# EAGLE board 13716-PI_Servo_Shield_panel.v10 (EAGLE 7.5.0), part 1 of 4
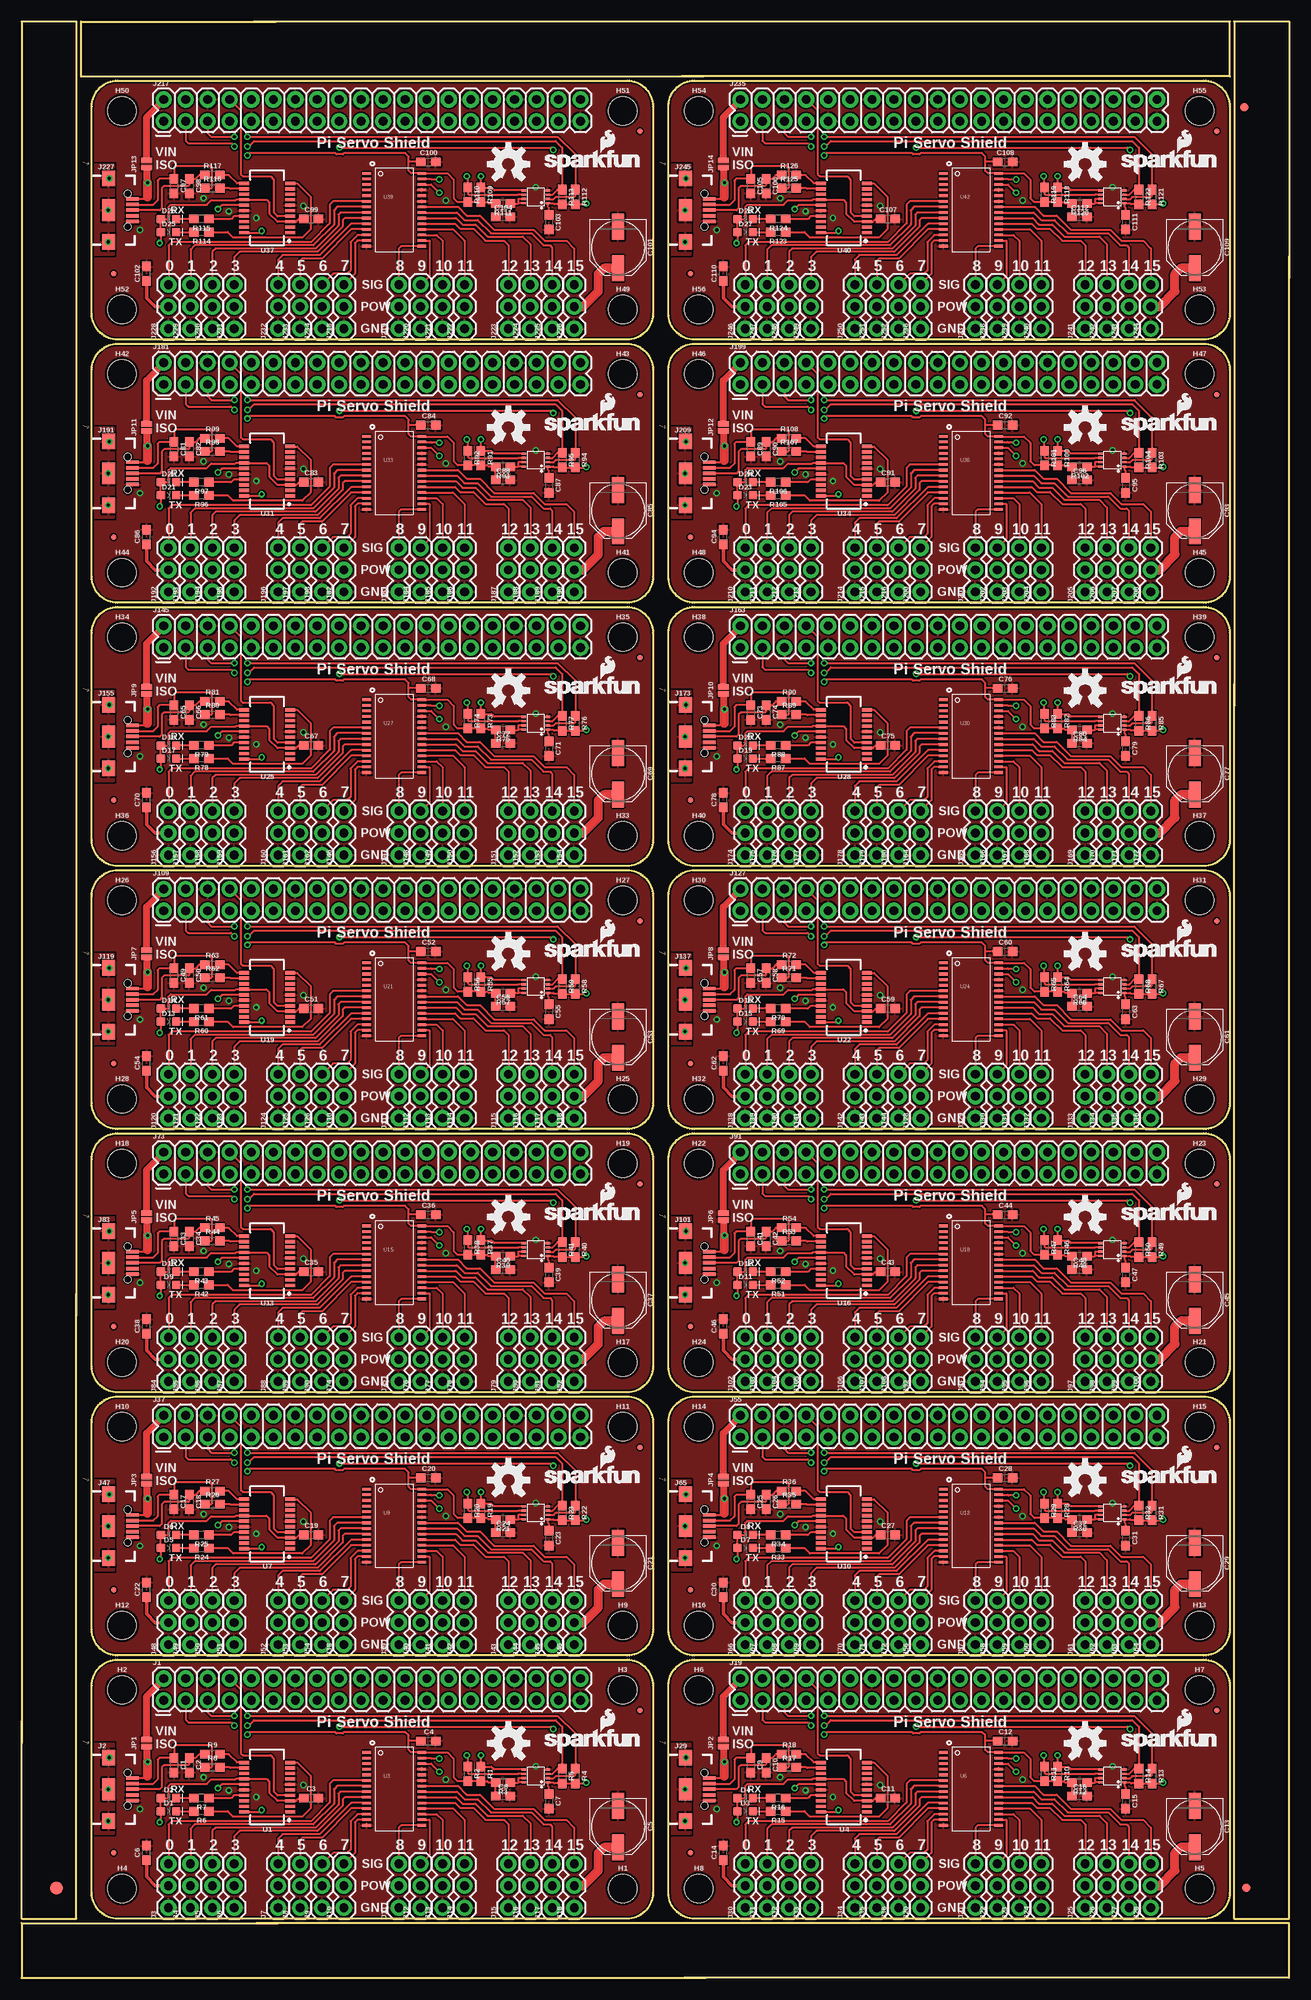
[diagram p0: board, top side]
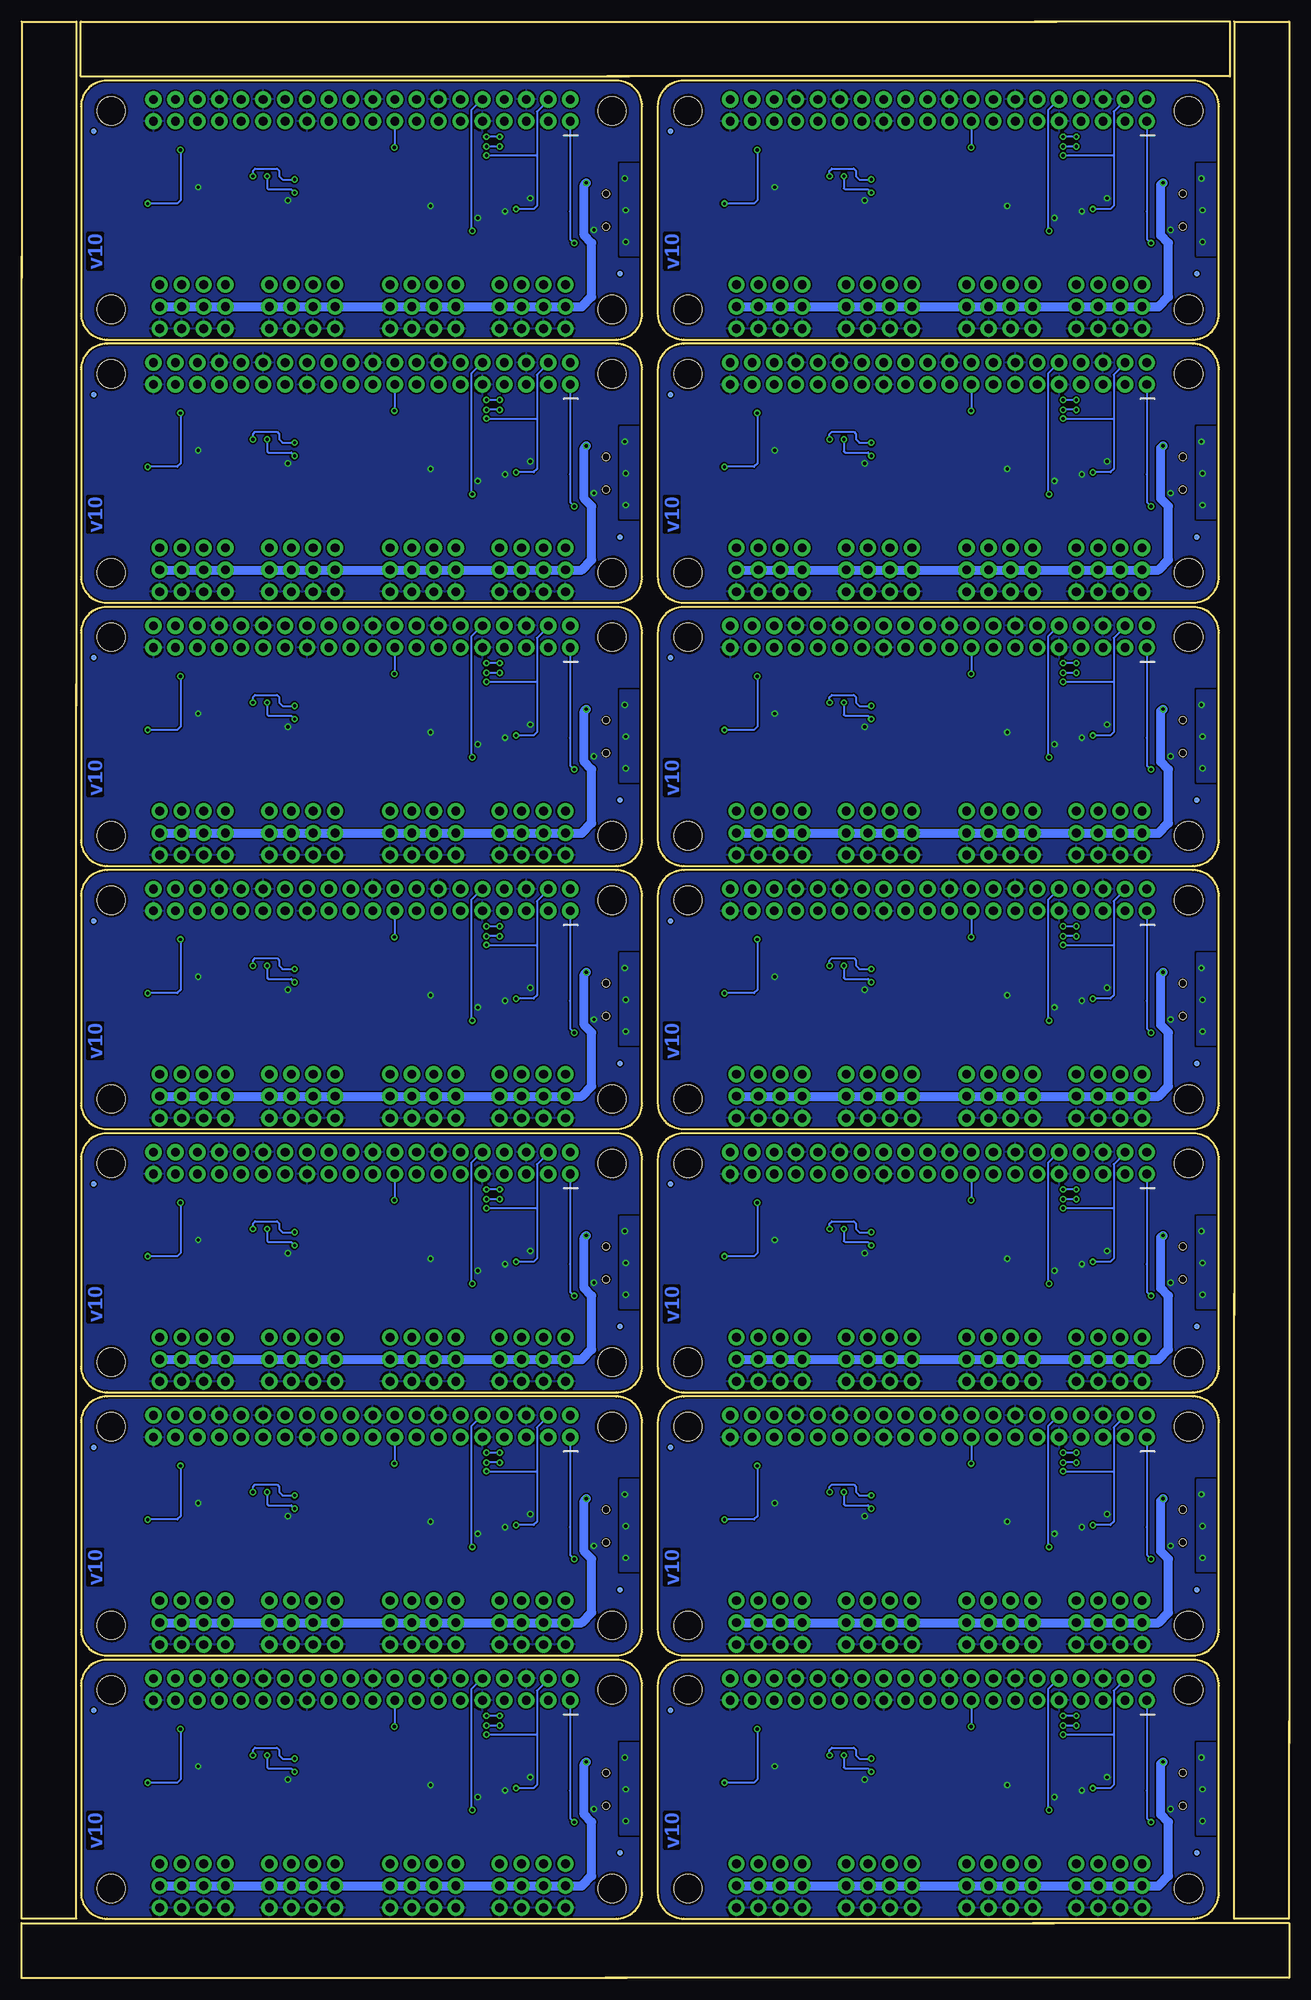
[diagram p1: board, bottom side, seen from below]

Size 146.81 x 226.57 mm. Coordinates in mm from the lower left corner, seen from the top.
Outline: 136 segments
Copper layers (1*16): Top 0.035mm / dielectric 1.5mm / Bottom 0.035mm
Design rules "SparkFun-2-layer-TIGHT": minimum track width 7mil, minimum drill 15mil, track to track 7mil, track to pad 7mil, pad to pad 7mil, via to via 7mil, smd to smd 7mil, copper to edge 7mil, drill to drill 7mil, minimum pad ring 7mil, minimum via ring 7mil, stop-mask expansion 4mil, vias tented up to drill 25mil, thermal gap 10mil

## Footprints (pad centres in the part's own frame; a part is rotated, then mirrored left to right if it is on the bottom)
0603 = smd 1.1 x 1: 1 -0.85,0; 2 0.85,0
PANASONIC_D = smd 3 x 1.4: + 2.4,0; - -2.4,0
LED-0603 = smd 1 x 1: A -0.877,0; C 0.877,0
FIDUCIAL-1.5X3 = smd 1.5 x 1.5: 1 0,0
FIDUCIAL-1X2 = smd 1 x 1: 1 0,0
FIDUCIAL-MICRO = smd 0.635 x 0.635: 1 0,0
STAND-OFF = hole 3.302: 0,0
2X20 = drill 1.016 pad 1.88: 1 0,0; 2 0,2.54; 3 2.54,0; 4 2.54,2.54; 5 5.08,0; 6 5.08,2.54; 7 7.62,0; 8 7.62,2.54; 9 10.16,0; 10 10.16,2.54; 11 12.7,0; 12 12.7,2.54; 13 15.24,0; 14 15.24,2.54; 15 17.78,0; 16 17.78,2.54; 17 20.32,0; 18 20.32,2.54; 19 22.86,0; 20 22.86,2.54; 21 25.4,0; 22 25.4,2.54; 23 27.94,0; 24 27.94,2.54; 25 30.48,0; 26 30.48,2.54; 27 33.02,0; 28 33.02,2.54; 29 35.56,0; 30 35.56,2.54; 31 38.1,0; 32 38.1,2.54; 33 40.64,0; 34 40.64,2.54; 35 43.18,0; 36 43.18,2.54; 37 45.72,0; 38 45.72,2.54; 39 48.26,0; 40 48.26,2.54
USB-B-MICRO-SMD = smd 1.45 x 0.4: D+ 2.725,0; D- 2.725,0.65; GND 2.725,-1.3; ID 2.725,-0.65; VBUS 2.725,1.3 | smd 1.5 x 1.8: SHIELD1 0,3.685; SHIELD2 0,-3.685 | smd 1.5 x 2.5: SHIELD3 0,0 | hole 0.85: 2.2,1.9; 2.2,-1.9
1X03 = drill 1.016 pad 1.88: 1 0,0; 2 2.54,0; 3 5.08,0
SMT-JUMPER_2_NC_PASTE_NO-SILK = smd 0.635 x 1.27: 1 -0.406,0; 2 0.406,0
SSOP20_L = smd 0.381 x 1.143: 1 -2.857,-2.68; 2 -2.223,-2.68; 3 -1.587,-2.68; 4 -0.953,-2.68; 5 -0.318,-2.68; 6 0.318,-2.68; 7 0.953,-2.68; 8 1.587,-2.68; 9 2.223,-2.68; 10 2.857,-2.68; 11 2.857,2.68; 12 2.223,2.68; 13 1.587,2.68; 14 0.953,2.68; 15 0.318,2.68; 16 -0.318,2.68; 17 -0.953,2.68; 18 -1.587,2.68; 19 -2.223,2.68; 20 -2.857,2.68
PSOP-8 = smd 0.25 x 0.5: 1 -0.73,-1.37; 2 -0.23,-1.37; 3 0.27,-1.37; 4 0.77,-1.37; 5 0.77,1.38; 6 0.27,1.38; 7 -0.23,1.38; 8 -0.73,1.38
TSSOP-28_4MM = smd 1 x 0.3: 1 -3.2,4.225; 2 -3.2,3.575; 3 -3.2,2.925; 4 -3.2,2.275; 5 -3.2,1.625; 6 -3.2,0.975; 7 -3.2,0.325; 8 -3.2,-0.325; 9 -3.2,-0.975; 10 -3.2,-1.625; 11 -3.2,-2.275; 12 -3.2,-2.925; 13 -3.2,-3.575; 14 -3.2,-4.225; 15 3.2,-4.225; 16 3.2,-3.575; 17 3.2,-2.925; 18 3.2,-2.275; 19 3.2,-1.625; 20 3.2,-0.975; 21 3.2,-0.325; 22 3.2,0.325; 23 3.2,0.975; 24 3.2,1.625; 25 3.2,2.275; 26 3.2,2.925; 27 3.2,3.575; 28 3.2,4.225

## Placement (x,y rotation side)
C1  47pF  [0603]  17.65,24.64 270 top
C2  47pF  [0603]  19.43,24.64 270 top
C3  0.1uF  [0603]  33.53,20.83 0 top
C4  0.1uF  [0603]  47.12,27.43 0 top
C5  100uF  [PANASONIC_D]  69.09,17.53 270 top
C6  0.1uF  [0603]  14.48,14.48 90 top
C7  0.1uF  [0603]  61.09,20.45 270 top
C8  0.1uF  [0603]  55.75,21.08 0 top
C9  47pF  [0603]  84.45,24.64 270 top
C10  47pF  [0603]  86.23,24.64 270 top
C11  0.1uF  [0603]  100.33,20.83 0 top
C12  0.1uF  [0603]  113.92,27.43 0 top
C13  100uF  [PANASONIC_D]  135.89,17.53 270 top
C14  0.1uF  [0603]  81.28,14.48 90 top
C15  0.1uF  [0603]  127.89,20.45 270 top
C16  0.1uF  [0603]  122.56,21.08 0 top
C17  47pF  [0603]  17.65,55.12 270 top
C18  47pF  [0603]  19.43,55.12 270 top
C19  0.1uF  [0603]  33.53,51.31 0 top
C20  0.1uF  [0603]  47.12,57.91 0 top
C21  100uF  [PANASONIC_D]  69.09,48.01 270 top
C22  0.1uF  [0603]  14.48,44.96 90 top
C23  0.1uF  [0603]  61.09,50.93 270 top
C24  0.1uF  [0603]  55.75,51.56 0 top
C25  47pF  [0603]  84.45,55.12 270 top
C26  47pF  [0603]  86.23,55.12 270 top
C27  0.1uF  [0603]  100.33,51.31 0 top
C28  0.1uF  [0603]  113.92,57.91 0 top
C29  100uF  [PANASONIC_D]  135.89,48.01 270 top
C30  0.1uF  [0603]  81.28,44.96 90 top
C31  0.1uF  [0603]  127.89,50.93 270 top
C32  0.1uF  [0603]  122.56,51.56 0 top
C33  47pF  [0603]  17.65,85.6 270 top
C34  47pF  [0603]  19.43,85.6 270 top
C35  0.1uF  [0603]  33.53,81.79 0 top
C36  0.1uF  [0603]  47.12,88.39 0 top
C37  100uF  [PANASONIC_D]  69.09,78.49 270 top
C38  0.1uF  [0603]  14.48,75.44 90 top
C39  0.1uF  [0603]  61.09,81.41 270 top
C40  0.1uF  [0603]  55.75,82.04 0 top
C41  47pF  [0603]  84.45,85.6 270 top
C42  47pF  [0603]  86.23,85.6 270 top
C43  0.1uF  [0603]  100.33,81.79 0 top
C44  0.1uF  [0603]  113.92,88.39 0 top
C45  100uF  [PANASONIC_D]  135.89,78.49 270 top
C46  0.1uF  [0603]  81.28,75.44 90 top
C47  0.1uF  [0603]  127.89,81.41 270 top
C48  0.1uF  [0603]  122.56,82.04 0 top
C49  47pF  [0603]  17.65,116.08 270 top
C50  47pF  [0603]  19.43,116.08 270 top
C51  0.1uF  [0603]  33.53,112.27 0 top
C52  0.1uF  [0603]  47.12,118.87 0 top
C53  100uF  [PANASONIC_D]  69.09,108.97 270 top
C54  0.1uF  [0603]  14.48,105.92 90 top
C55  0.1uF  [0603]  61.09,111.89 270 top
C56  0.1uF  [0603]  55.75,112.52 0 top
C57  47pF  [0603]  84.45,116.08 270 top
C58  47pF  [0603]  86.23,116.08 270 top
C59  0.1uF  [0603]  100.33,112.27 0 top
C60  0.1uF  [0603]  113.92,118.87 0 top
C61  100uF  [PANASONIC_D]  135.89,108.97 270 top
C62  0.1uF  [0603]  81.28,105.92 90 top
C63  0.1uF  [0603]  127.89,111.89 270 top
C64  0.1uF  [0603]  122.56,112.52 0 top
C65  47pF  [0603]  17.65,146.56 270 top
C66  47pF  [0603]  19.43,146.56 270 top
C67  0.1uF  [0603]  33.53,142.75 0 top
C68  0.1uF  [0603]  47.12,149.35 0 top
C69  100uF  [PANASONIC_D]  69.09,139.45 270 top
C70  0.1uF  [0603]  14.48,136.4 90 top
C71  0.1uF  [0603]  61.09,142.37 270 top
C72  0.1uF  [0603]  55.75,143 0 top
C73  47pF  [0603]  84.45,146.56 270 top
C74  47pF  [0603]  86.23,146.56 270 top
C75  0.1uF  [0603]  100.33,142.75 0 top
C76  0.1uF  [0603]  113.92,149.35 0 top
C77  100uF  [PANASONIC_D]  135.89,139.45 270 top
C78  0.1uF  [0603]  81.28,136.4 90 top
C79  0.1uF  [0603]  127.89,142.37 270 top
C80  0.1uF  [0603]  122.56,143 0 top
C81  47pF  [0603]  17.65,177.04 270 top
C82  47pF  [0603]  19.43,177.04 270 top
C83  0.1uF  [0603]  33.53,173.23 0 top
C84  0.1uF  [0603]  47.12,179.83 0 top
C85  100uF  [PANASONIC_D]  69.09,169.93 270 top
C86  0.1uF  [0603]  14.48,166.88 90 top
C87  0.1uF  [0603]  61.09,172.85 270 top
C88  0.1uF  [0603]  55.75,173.48 0 top
C89  47pF  [0603]  84.45,177.04 270 top
C90  47pF  [0603]  86.23,177.04 270 top
C91  0.1uF  [0603]  100.33,173.23 0 top
C92  0.1uF  [0603]  113.92,179.83 0 top
C93  100uF  [PANASONIC_D]  135.89,169.93 270 top
C94  0.1uF  [0603]  81.28,166.88 90 top
C95  0.1uF  [0603]  127.89,172.85 270 top
C96  0.1uF  [0603]  122.56,173.48 0 top
C97  47pF  [0603]  17.65,207.52 270 top
C98  47pF  [0603]  19.43,207.52 270 top
C99  0.1uF  [0603]  33.53,203.71 0 top
C100  0.1uF  [0603]  47.12,210.31 0 top
C101  100uF  [PANASONIC_D]  69.09,200.41 270 top
C102  0.1uF  [0603]  14.48,197.36 90 top
C103  0.1uF  [0603]  61.09,203.33 270 top
C104  0.1uF  [0603]  55.75,203.96 0 top
C105  47pF  [0603]  84.45,207.52 270 top
C106  47pF  [0603]  86.23,207.52 270 top
C107  0.1uF  [0603]  100.33,203.71 0 top
C108  0.1uF  [0603]  113.92,210.31 0 top
C109  100uF  [PANASONIC_D]  135.89,200.41 270 top
C110  0.1uF  [0603]  81.28,197.36 90 top
C111  0.1uF  [0603]  127.89,203.33 270 top
C112  0.1uF  [0603]  122.56,203.96 0 top
D1  GREEN  [LED-0603]  17.02,19.3 0 top
D2  Yellow  [LED-0603]  17.02,20.83 0 top
D3  GREEN  [LED-0603]  83.82,19.3 0 top
D4  Yellow  [LED-0603]  83.82,20.83 0 top
D5  GREEN  [LED-0603]  17.02,49.78 0 top
D6  Yellow  [LED-0603]  17.02,51.31 0 top
D7  GREEN  [LED-0603]  83.82,49.78 0 top
D8  Yellow  [LED-0603]  83.82,51.31 0 top
D9  GREEN  [LED-0603]  17.02,80.26 0 top
D10  Yellow  [LED-0603]  17.02,81.79 0 top
D11  GREEN  [LED-0603]  83.82,80.26 0 top
D12  Yellow  [LED-0603]  83.82,81.79 0 top
D13  GREEN  [LED-0603]  17.02,110.74 0 top
D14  Yellow  [LED-0603]  17.02,112.27 0 top
D15  GREEN  [LED-0603]  83.82,110.74 0 top
D16  Yellow  [LED-0603]  83.82,112.27 0 top
D17  GREEN  [LED-0603]  17.02,141.22 0 top
D18  Yellow  [LED-0603]  17.02,142.75 0 top
D19  GREEN  [LED-0603]  83.82,141.22 0 top
D20  Yellow  [LED-0603]  83.82,142.75 0 top
D21  GREEN  [LED-0603]  17.02,171.7 0 top
D22  Yellow  [LED-0603]  17.02,173.23 0 top
D23  GREEN  [LED-0603]  83.82,171.7 0 top
D24  Yellow  [LED-0603]  83.82,173.23 0 top
D25  GREEN  [LED-0603]  17.02,202.18 0 top
D26  Yellow  [LED-0603]  17.02,203.71 0 top
D27  GREEN  [LED-0603]  83.82,202.18 0 top
D28  Yellow  [LED-0603]  83.82,203.71 0 top
E$1  [FIDUCIAL-1.5X3]  4.06,10.41 0 top
E$7  [FIDUCIAL-1X2]  141.6,216.66 180 top
E$8  [FIDUCIAL-1X2]  141.86,10.41 0 top
FD1  FIDUCIALUFIDUCIAL  [FIDUCIAL-MICRO]  10.67,14.48 0 top
FD2  FIDUCIALUFIDUCIAL  [FIDUCIAL-MICRO]  71.63,30.99 0 top
FD3  FIDUCIALUFIDUCIAL  [FIDUCIAL-MICRO]  10.67,14.48 0 bottom
FD4  FIDUCIALUFIDUCIAL  [FIDUCIAL-MICRO]  71.63,30.99 0 bottom
FD5  FIDUCIALUFIDUCIAL  [FIDUCIAL-MICRO]  77.47,14.48 0 top
FD6  FIDUCIALUFIDUCIAL  [FIDUCIAL-MICRO]  138.43,30.99 0 top
FD7  FIDUCIALUFIDUCIAL  [FIDUCIAL-MICRO]  77.47,14.48 0 bottom
FD8  FIDUCIALUFIDUCIAL  [FIDUCIAL-MICRO]  138.43,30.99 0 bottom
FD9  FIDUCIALUFIDUCIAL  [FIDUCIAL-MICRO]  10.67,44.96 0 top
FD10  FIDUCIALUFIDUCIAL  [FIDUCIAL-MICRO]  71.63,61.47 0 top
FD11  FIDUCIALUFIDUCIAL  [FIDUCIAL-MICRO]  10.67,44.96 0 bottom
FD12  FIDUCIALUFIDUCIAL  [FIDUCIAL-MICRO]  71.63,61.47 0 bottom
FD13  FIDUCIALUFIDUCIAL  [FIDUCIAL-MICRO]  77.47,44.96 0 top
FD14  FIDUCIALUFIDUCIAL  [FIDUCIAL-MICRO]  138.43,61.47 0 top
FD15  FIDUCIALUFIDUCIAL  [FIDUCIAL-MICRO]  77.47,44.96 0 bottom
FD16  FIDUCIALUFIDUCIAL  [FIDUCIAL-MICRO]  138.43,61.47 0 bottom
FD17  FIDUCIALUFIDUCIAL  [FIDUCIAL-MICRO]  10.67,75.44 0 top
FD18  FIDUCIALUFIDUCIAL  [FIDUCIAL-MICRO]  71.63,91.95 0 top
FD19  FIDUCIALUFIDUCIAL  [FIDUCIAL-MICRO]  10.67,75.44 0 bottom
FD20  FIDUCIALUFIDUCIAL  [FIDUCIAL-MICRO]  71.63,91.95 0 bottom
FD21  FIDUCIALUFIDUCIAL  [FIDUCIAL-MICRO]  77.47,75.44 0 top
FD22  FIDUCIALUFIDUCIAL  [FIDUCIAL-MICRO]  138.43,91.95 0 top
FD23  FIDUCIALUFIDUCIAL  [FIDUCIAL-MICRO]  77.47,75.44 0 bottom
FD24  FIDUCIALUFIDUCIAL  [FIDUCIAL-MICRO]  138.43,91.95 0 bottom
FD25  FIDUCIALUFIDUCIAL  [FIDUCIAL-MICRO]  10.67,105.92 0 top
FD26  FIDUCIALUFIDUCIAL  [FIDUCIAL-MICRO]  71.63,122.43 0 top
FD27  FIDUCIALUFIDUCIAL  [FIDUCIAL-MICRO]  10.67,105.92 0 bottom
FD28  FIDUCIALUFIDUCIAL  [FIDUCIAL-MICRO]  71.63,122.43 0 bottom
FD29  FIDUCIALUFIDUCIAL  [FIDUCIAL-MICRO]  77.47,105.92 0 top
FD30  FIDUCIALUFIDUCIAL  [FIDUCIAL-MICRO]  138.43,122.43 0 top
FD31  FIDUCIALUFIDUCIAL  [FIDUCIAL-MICRO]  77.47,105.92 0 bottom
FD32  FIDUCIALUFIDUCIAL  [FIDUCIAL-MICRO]  138.43,122.43 0 bottom
FD33  FIDUCIALUFIDUCIAL  [FIDUCIAL-MICRO]  10.67,136.4 0 top
FD34  FIDUCIALUFIDUCIAL  [FIDUCIAL-MICRO]  71.63,152.91 0 top
FD35  FIDUCIALUFIDUCIAL  [FIDUCIAL-MICRO]  10.67,136.4 0 bottom
FD36  FIDUCIALUFIDUCIAL  [FIDUCIAL-MICRO]  71.63,152.91 0 bottom
FD37  FIDUCIALUFIDUCIAL  [FIDUCIAL-MICRO]  77.47,136.4 0 top
FD38  FIDUCIALUFIDUCIAL  [FIDUCIAL-MICRO]  138.43,152.91 0 top
FD39  FIDUCIALUFIDUCIAL  [FIDUCIAL-MICRO]  77.47,136.4 0 bottom
FD40  FIDUCIALUFIDUCIAL  [FIDUCIAL-MICRO]  138.43,152.91 0 bottom
FD41  FIDUCIALUFIDUCIAL  [FIDUCIAL-MICRO]  10.67,166.88 0 top
FD42  FIDUCIALUFIDUCIAL  [FIDUCIAL-MICRO]  71.63,183.39 0 top
FD43  FIDUCIALUFIDUCIAL  [FIDUCIAL-MICRO]  10.67,166.88 0 bottom
FD44  FIDUCIALUFIDUCIAL  [FIDUCIAL-MICRO]  71.63,183.39 0 bottom
FD45  FIDUCIALUFIDUCIAL  [FIDUCIAL-MICRO]  77.47,166.88 0 top
FD46  FIDUCIALUFIDUCIAL  [FIDUCIAL-MICRO]  138.43,183.39 0 top
FD47  FIDUCIALUFIDUCIAL  [FIDUCIAL-MICRO]  77.47,166.88 0 bottom
FD48  FIDUCIALUFIDUCIAL  [FIDUCIAL-MICRO]  138.43,183.39 0 bottom
FD49  FIDUCIALUFIDUCIAL  [FIDUCIAL-MICRO]  10.67,197.36 0 top
FD50  FIDUCIALUFIDUCIAL  [FIDUCIAL-MICRO]  71.63,213.87 0 top
FD51  FIDUCIALUFIDUCIAL  [FIDUCIAL-MICRO]  10.67,197.36 0 bottom
FD52  FIDUCIALUFIDUCIAL  [FIDUCIAL-MICRO]  71.63,213.87 0 bottom
FD53  FIDUCIALUFIDUCIAL  [FIDUCIAL-MICRO]  77.47,197.36 0 top
FD54  FIDUCIALUFIDUCIAL  [FIDUCIAL-MICRO]  138.43,213.87 0 top
FD55  FIDUCIALUFIDUCIAL  [FIDUCIAL-MICRO]  77.47,197.36 0 bottom
FD56  FIDUCIALUFIDUCIAL  [FIDUCIAL-MICRO]  138.43,213.87 0 bottom
H1  STAND-OFF  [STAND-OFF]  69.63,10.36 0 top
H2  STAND-OFF  [STAND-OFF]  11.63,33.36 0 top
H3  STAND-OFF  [STAND-OFF]  69.63,33.36 0 top
H4  STAND-OFF  [STAND-OFF]  11.63,10.36 0 top
H5  STAND-OFF  [STAND-OFF]  136.43,10.36 0 top
H6  STAND-OFF  [STAND-OFF]  78.43,33.36 0 top
H7  STAND-OFF  [STAND-OFF]  136.43,33.36 0 top
H8  STAND-OFF  [STAND-OFF]  78.43,10.36 0 top
H9  STAND-OFF  [STAND-OFF]  69.63,40.84 0 top
H10  STAND-OFF  [STAND-OFF]  11.63,63.84 0 top
H11  STAND-OFF  [STAND-OFF]  69.63,63.84 0 top
H12  STAND-OFF  [STAND-OFF]  11.63,40.84 0 top
H13  STAND-OFF  [STAND-OFF]  136.43,40.84 0 top
H14  STAND-OFF  [STAND-OFF]  78.43,63.84 0 top
H15  STAND-OFF  [STAND-OFF]  136.43,63.84 0 top
H16  STAND-OFF  [STAND-OFF]  78.43,40.84 0 top
H17  STAND-OFF  [STAND-OFF]  69.63,71.32 0 top
H18  STAND-OFF  [STAND-OFF]  11.63,94.32 0 top
H19  STAND-OFF  [STAND-OFF]  69.63,94.32 0 top
H20  STAND-OFF  [STAND-OFF]  11.63,71.32 0 top
H21  STAND-OFF  [STAND-OFF]  136.43,71.32 0 top
H22  STAND-OFF  [STAND-OFF]  78.43,94.32 0 top
H23  STAND-OFF  [STAND-OFF]  136.43,94.32 0 top
H24  STAND-OFF  [STAND-OFF]  78.43,71.32 0 top
H25  STAND-OFF  [STAND-OFF]  69.63,101.8 0 top
H26  STAND-OFF  [STAND-OFF]  11.63,124.8 0 top
H27  STAND-OFF  [STAND-OFF]  69.63,124.8 0 top
H28  STAND-OFF  [STAND-OFF]  11.63,101.8 0 top
H29  STAND-OFF  [STAND-OFF]  136.43,101.8 0 top
H30  STAND-OFF  [STAND-OFF]  78.43,124.8 0 top
H31  STAND-OFF  [STAND-OFF]  136.43,124.8 0 top
H32  STAND-OFF  [STAND-OFF]  78.43,101.8 0 top
H33  STAND-OFF  [STAND-OFF]  69.63,132.28 0 top
H34  STAND-OFF  [STAND-OFF]  11.63,155.28 0 top
H35  STAND-OFF  [STAND-OFF]  69.63,155.28 0 top
H36  STAND-OFF  [STAND-OFF]  11.63,132.28 0 top
H37  STAND-OFF  [STAND-OFF]  136.43,132.28 0 top
H38  STAND-OFF  [STAND-OFF]  78.43,155.28 0 top
H39  STAND-OFF  [STAND-OFF]  136.43,155.28 0 top
H40  STAND-OFF  [STAND-OFF]  78.43,132.28 0 top
H41  STAND-OFF  [STAND-OFF]  69.63,162.76 0 top
H42  STAND-OFF  [STAND-OFF]  11.63,185.76 0 top
H43  STAND-OFF  [STAND-OFF]  69.63,185.76 0 top
H44  STAND-OFF  [STAND-OFF]  11.63,162.76 0 top
H45  STAND-OFF  [STAND-OFF]  136.43,162.76 0 top
H46  STAND-OFF  [STAND-OFF]  78.43,185.76 0 top
H47  STAND-OFF  [STAND-OFF]  136.43,185.76 0 top
H48  STAND-OFF  [STAND-OFF]  78.43,162.76 0 top
H49  STAND-OFF  [STAND-OFF]  69.63,193.24 0 top
H50  STAND-OFF  [STAND-OFF]  11.63,216.24 0 top
H51  STAND-OFF  [STAND-OFF]  69.63,216.24 0 top
H52  STAND-OFF  [STAND-OFF]  11.63,193.24 0 top
H53  STAND-OFF  [STAND-OFF]  136.43,193.24 0 top
H54  STAND-OFF  [STAND-OFF]  78.43,216.24 0 top
H55  STAND-OFF  [STAND-OFF]  136.43,216.24 0 top
H56  STAND-OFF  [STAND-OFF]  78.43,193.24 0 top
J1  RASPBERRYPI-40-PIN-GPIO_PTH_NO_SHROUD  [2X20]  16.47,32.14 0 top
J2  [USB-B-MICRO-SMD]  10.11,21.85 0 top
J3  [1X03]  17.02,8.13 90 top
J4  [1X03]  19.56,8.13 90 top
J5  [1X03]  22.1,8.13 90 top
J6  [1X03]  24.64,8.13 90 top
J7  [1X03]  29.72,8.13 90 top
J8  [1X03]  32.26,8.13 90 top
J9  [1X03]  34.8,8.13 90 top
J10  [1X03]  37.34,8.13 90 top
J11  [1X03]  43.69,8.13 90 top
J12  [1X03]  46.23,8.13 90 top
J13  [1X03]  48.77,8.13 90 top
J14  [1X03]  51.31,8.13 90 top
J15  [1X03]  56.39,8.13 90 top
J16  [1X03]  58.93,8.13 90 top
J17  [1X03]  61.47,8.13 90 top
J18  [1X03]  64.01,8.13 90 top
J19  RASPBERRYPI-40-PIN-GPIO_PTH_NO_SHROUD  [2X20]  83.27,32.14 0 top
J20  [1X03]  104.14,8.13 90 top
J21  [1X03]  110.49,8.13 90 top
J22  [1X03]  113.03,8.13 90 top
J23  [1X03]  115.57,8.13 90 top
J24  [1X03]  118.11,8.13 90 top
J25  [1X03]  123.19,8.13 90 top
J26  [1X03]  125.73,8.13 90 top
J27  [1X03]  128.27,8.13 90 top
J28  [1X03]  130.81,8.13 90 top
J29  [USB-B-MICRO-SMD]  76.91,21.85 0 top
J30  [1X03]  83.82,8.13 90 top
J31  [1X03]  86.36,8.13 90 top
J32  [1X03]  88.9,8.13 90 top
J33  [1X03]  91.44,8.13 90 top
J34  [1X03]  96.52,8.13 90 top
J35  [1X03]  99.06,8.13 90 top
J36  [1X03]  101.6,8.13 90 top
J37  RASPBERRYPI-40-PIN-GPIO_PTH_NO_SHROUD  [2X20]  16.47,62.62 0 top
J38  [1X03]  37.34,38.61 90 top
J39  [1X03]  43.69,38.61 90 top
J40  [1X03]  46.23,38.61 90 top
J41  [1X03]  48.77,38.61 90 top
J42  [1X03]  51.31,38.61 90 top
J43  [1X03]  56.39,38.61 90 top
J44  [1X03]  58.93,38.61 90 top
J45  [1X03]  61.47,38.61 90 top
J46  [1X03]  64.01,38.61 90 top
J47  [USB-B-MICRO-SMD]  10.11,52.33 0 top
J48  [1X03]  17.02,38.61 90 top
J49  [1X03]  19.56,38.61 90 top
J50  [1X03]  22.1,38.61 90 top
J51  [1X03]  24.64,38.61 90 top
J52  [1X03]  29.72,38.61 90 top
J53  [1X03]  32.26,38.61 90 top
J54  [1X03]  34.8,38.61 90 top
J55  RASPBERRYPI-40-PIN-GPIO_PTH_NO_SHROUD  [2X20]  83.27,62.62 0 top
J56  [1X03]  104.14,38.61 90 top
J57  [1X03]  110.49,38.61 90 top
J58  [1X03]  113.03,38.61 90 top
J59  [1X03]  115.57,38.61 90 top
J60  [1X03]  118.11,38.61 90 top
J61  [1X03]  123.19,38.61 90 top
J62  [1X03]  125.73,38.61 90 top
J63  [1X03]  128.27,38.61 90 top
J64  [1X03]  130.81,38.61 90 top
J65  [USB-B-MICRO-SMD]  76.91,52.33 0 top
J66  [1X03]  83.82,38.61 90 top
J67  [1X03]  86.36,38.61 90 top
J68  [1X03]  88.9,38.61 90 top
J69  [1X03]  91.44,38.61 90 top
J70  [1X03]  96.52,38.61 90 top
J71  [1X03]  99.06,38.61 90 top
J72  [1X03]  101.6,38.61 90 top
J73  RASPBERRYPI-40-PIN-GPIO_PTH_NO_SHROUD  [2X20]  16.47,93.1 0 top
J74  [1X03]  37.34,69.09 90 top
J75  [1X03]  43.69,69.09 90 top
J76  [1X03]  46.23,69.09 90 top
J77  [1X03]  48.77,69.09 90 top
J78  [1X03]  51.31,69.09 90 top
J79  [1X03]  56.39,69.09 90 top
J80  [1X03]  58.93,69.09 90 top
J81  [1X03]  61.47,69.09 90 top
J82  [1X03]  64.01,69.09 90 top
J83  [USB-B-MICRO-SMD]  10.11,82.81 0 top
J84  [1X03]  17.02,69.09 90 top
J85  [1X03]  19.56,69.09 90 top
J86  [1X03]  22.1,69.09 90 top
J87  [1X03]  24.64,69.09 90 top
J88  [1X03]  29.72,69.09 90 top
J89  [1X03]  32.26,69.09 90 top
J90  [1X03]  34.8,69.09 90 top
J91  RASPBERRYPI-40-PIN-GPIO_PTH_NO_SHROUD  [2X20]  83.27,93.1 0 top
J92  [1X03]  104.14,69.09 90 top
J93  [1X03]  110.49,69.09 90 top
J94  [1X03]  113.03,69.09 90 top
J95  [1X03]  115.57,69.09 90 top
J96  [1X03]  118.11,69.09 90 top
J97  [1X03]  123.19,69.09 90 top
J98  [1X03]  125.73,69.09 90 top
J99  [1X03]  128.27,69.09 90 top
J100  [1X03]  130.81,69.09 90 top
J101  [USB-B-MICRO-SMD]  76.91,82.81 0 top
J102  [1X03]  83.82,69.09 90 top
J103  [1X03]  86.36,69.09 90 top
J104  [1X03]  88.9,69.09 90 top
J105  [1X03]  91.44,69.09 90 top
J106  [1X03]  96.52,69.09 90 top
J107  [1X03]  99.06,69.09 90 top
J108  [1X03]  101.6,69.09 90 top
J109  RASPBERRYPI-40-PIN-GPIO_PTH_NO_SHROUD  [2X20]  16.47,123.58 0 top
J110  [1X03]  37.34,99.57 90 top
J111  [1X03]  43.69,99.57 90 top
J112  [1X03]  46.23,99.57 90 top
J113  [1X03]  48.77,99.57 90 top
J114  [1X03]  51.31,99.57 90 top
J115  [1X03]  56.39,99.57 90 top
J116  [1X03]  58.93,99.57 90 top
J117  [1X03]  61.47,99.57 90 top
J118  [1X03]  64.01,99.57 90 top
J119  [USB-B-MICRO-SMD]  10.11,113.29 0 top
J120  [1X03]  17.02,99.57 90 top
J121  [1X03]  19.56,99.57 90 top
J122  [1X03]  22.1,99.57 90 top
J123  [1X03]  24.64,99.57 90 top
J124  [1X03]  29.72,99.57 90 top
J125  [1X03]  32.26,99.57 90 top
J126  [1X03]  34.8,99.57 90 top
J127  RASPBERRYPI-40-PIN-GPIO_PTH_NO_SHROUD  [2X20]  83.27,123.58 0 top
J128  [1X03]  104.14,99.57 90 top
J129  [1X03]  110.49,99.57 90 top
J130  [1X03]  113.03,99.57 90 top
J131  [1X03]  115.57,99.57 90 top
J132  [1X03]  118.11,99.57 90 top
J133  [1X03]  123.19,99.57 90 top
J134  [1X03]  125.73,99.57 90 top
J135  [1X03]  128.27,99.57 90 top
J136  [1X03]  130.81,99.57 90 top
J137  [USB-B-MICRO-SMD]  76.91,113.29 0 top
J138  [1X03]  83.82,99.57 90 top
J139  [1X03]  86.36,99.57 90 top
J140  [1X03]  88.9,99.57 90 top
J141  [1X03]  91.44,99.57 90 top
J142  [1X03]  96.52,99.57 90 top
J143  [1X03]  99.06,99.57 90 top
J144  [1X03]  101.6,99.57 90 top
J145  RASPBERRYPI-40-PIN-GPIO_PTH_NO_SHROUD  [2X20]  16.47,154.06 0 top
J146  [1X03]  37.34,130.05 90 top
J147  [1X03]  43.69,130.05 90 top
J148  [1X03]  46.23,130.05 90 top
J149  [1X03]  48.77,130.05 90 top
J150  [1X03]  51.31,130.05 90 top
J151  [1X03]  56.39,130.05 90 top
J152  [1X03]  58.93,130.05 90 top
J153  [1X03]  61.47,130.05 90 top
J154  [1X03]  64.01,130.05 90 top
J155  [USB-B-MICRO-SMD]  10.11,143.77 0 top
J156  [1X03]  17.02,130.05 90 top
J157  [1X03]  19.56,130.05 90 top
J158  [1X03]  22.1,130.05 90 top
J159  [1X03]  24.64,130.05 90 top
J160  [1X03]  29.72,130.05 90 top
J161  [1X03]  32.26,130.05 90 top
J162  [1X03]  34.8,130.05 90 top
J163  RASPBERRYPI-40-PIN-GPIO_PTH_NO_SHROUD  [2X20]  83.27,154.06 0 top
J164  [1X03]  104.14,130.05 90 top
J165  [1X03]  110.49,130.05 90 top
J166  [1X03]  113.03,130.05 90 top
J167  [1X03]  115.57,130.05 90 top
J168  [1X03]  118.11,130.05 90 top
J169  [1X03]  123.19,130.05 90 top
J170  [1X03]  125.73,130.05 90 top
J171  [1X03]  128.27,130.05 90 top
J172  [1X03]  130.81,130.05 90 top
J173  [USB-B-MICRO-SMD]  76.91,143.77 0 top
J174  [1X03]  83.82,130.05 90 top
J175  [1X03]  86.36,130.05 90 top
J176  [1X03]  88.9,130.05 90 top
J177  [1X03]  91.44,130.05 90 top
J178  [1X03]  96.52,130.05 90 top
J179  [1X03]  99.06,130.05 90 top
J180  [1X03]  101.6,130.05 90 top
J181  RASPBERRYPI-40-PIN-GPIO_PTH_NO_SHROUD  [2X20]  16.47,184.54 0 top
J182  [1X03]  37.34,160.53 90 top
J183  [1X03]  43.69,160.53 90 top
J184  [1X03]  46.23,160.53 90 top
J185  [1X03]  48.77,160.53 90 top
J186  [1X03]  51.31,160.53 90 top
J187  [1X03]  56.39,160.53 90 top
J188  [1X03]  58.93,160.53 90 top
J189  [1X03]  61.47,160.53 90 top
J190  [1X03]  64.01,160.53 90 top
J191  [USB-B-MICRO-SMD]  10.11,174.25 0 top
J192  [1X03]  17.02,160.53 90 top
J193  [1X03]  19.56,160.53 90 top
J194  [1X03]  22.1,160.53 90 top
J195  [1X03]  24.64,160.53 90 top
J196  [1X03]  29.72,160.53 90 top
J197  [1X03]  32.26,160.53 90 top
J198  [1X03]  34.8,160.53 90 top
J199  RASPBERRYPI-40-PIN-GPIO_PTH_NO_SHROUD  [2X20]  83.27,184.54 0 top
J200  [1X03]  104.14,160.53 90 top
J201  [1X03]  110.49,160.53 90 top
J202  [1X03]  113.03,160.53 90 top
J203  [1X03]  115.57,160.53 90 top
J204  [1X03]  118.11,160.53 90 top
J205  [1X03]  123.19,160.53 90 top
J206  [1X03]  125.73,160.53 90 top
J207  [1X03]  128.27,160.53 90 top
J208  [1X03]  130.81,160.53 90 top
J209  [USB-B-MICRO-SMD]  76.91,174.25 0 top
J210  [1X03]  83.82,160.53 90 top
J211  [1X03]  86.36,160.53 90 top
J212  [1X03]  88.9,160.53 90 top
J213  [1X03]  91.44,160.53 90 top
J214  [1X03]  96.52,160.53 90 top
J215  [1X03]  99.06,160.53 90 top
J216  [1X03]  101.6,160.53 90 top
J217  RASPBERRYPI-40-PIN-GPIO_PTH_NO_SHROUD  [2X20]  16.47,215.02 0 top
J218  [1X03]  37.34,191.01 90 top
J219  [1X03]  43.69,191.01 90 top
J220  [1X03]  46.23,191.01 90 top
J221  [1X03]  48.77,191.01 90 top
J222  [1X03]  51.31,191.01 90 top
J223  [1X03]  56.39,191.01 90 top
J224  [1X03]  58.93,191.01 90 top
J225  [1X03]  61.47,191.01 90 top
J226  [1X03]  64.01,191.01 90 top
J227  [USB-B-MICRO-SMD]  10.11,204.73 0 top
J228  [1X03]  17.02,191.01 90 top
J229  [1X03]  19.56,191.01 90 top
J230  [1X03]  22.1,191.01 90 top
J231  [1X03]  24.64,191.01 90 top
J232  [1X03]  29.72,191.01 90 top
J233  [1X03]  32.26,191.01 90 top
J234  [1X03]  34.8,191.01 90 top
J235  RASPBERRYPI-40-PIN-GPIO_PTH_NO_SHROUD  [2X20]  83.27,215.02 0 top
J236  [1X03]  104.14,191.01 90 top
J237  [1X03]  110.49,191.01 90 top
J238  [1X03]  113.03,191.01 90 top
J239  [1X03]  115.57,191.01 90 top
J240  [1X03]  118.11,191.01 90 top
J241  [1X03]  123.19,191.01 90 top
J242  [1X03]  125.73,191.01 90 top
J243  [1X03]  128.27,191.01 90 top
J244  [1X03]  130.81,191.01 90 top
J245  [USB-B-MICRO-SMD]  76.91,204.73 0 top
J246  [1X03]  83.82,191.01 90 top
J247  [1X03]  86.36,191.01 90 top
J248  [1X03]  88.9,191.01 90 top
J249  [1X03]  91.44,191.01 90 top
J250  [1X03]  96.52,191.01 90 top
J251  [1X03]  99.06,191.01 90 top
J252  [1X03]  101.6,191.01 90 top
JP1  JUMPER-SMT_2_NC_PASTE_NO-SILK  [SMT-JUMPER_2_NC_PASTE_NO-SILK]  14.48,27.18 90 top
JP2  JUMPER-SMT_2_NC_PASTE_NO-SILK  [SMT-JUMPER_2_NC_PASTE_NO-SILK]  81.28,27.18 90 top
JP3  JUMPER-SMT_2_NC_PASTE_NO-SILK  [SMT-JUMPER_2_NC_PASTE_NO-SILK]  14.48,57.66 90 top
JP4  JUMPER-SMT_2_NC_PASTE_NO-SILK  [SMT-JUMPER_2_NC_PASTE_NO-SILK]  81.28,57.66 90 top
JP5  JUMPER-SMT_2_NC_PASTE_NO-SILK  [SMT-JUMPER_2_NC_PASTE_NO-SILK]  14.48,88.14 90 top
JP6  JUMPER-SMT_2_NC_PASTE_NO-SILK  [SMT-JUMPER_2_NC_PASTE_NO-SILK]  81.28,88.14 90 top
JP7  JUMPER-SMT_2_NC_PASTE_NO-SILK  [SMT-JUMPER_2_NC_PASTE_NO-SILK]  14.48,118.62 90 top
JP8  JUMPER-SMT_2_NC_PASTE_NO-SILK  [SMT-JUMPER_2_NC_PASTE_NO-SILK]  81.28,118.62 90 top
JP9  JUMPER-SMT_2_NC_PASTE_NO-SILK  [SMT-JUMPER_2_NC_PASTE_NO-SILK]  14.48,149.1 90 top
JP10  JUMPER-SMT_2_NC_PASTE_NO-SILK  [SMT-JUMPER_2_NC_PASTE_NO-SILK]  81.28,149.1 90 top
JP11  JUMPER-SMT_2_NC_PASTE_NO-SILK  [SMT-JUMPER_2_NC_PASTE_NO-SILK]  14.48,179.58 90 top
JP12  JUMPER-SMT_2_NC_PASTE_NO-SILK  [SMT-JUMPER_2_NC_PASTE_NO-SILK]  81.28,179.58 90 top
JP13  JUMPER-SMT_2_NC_PASTE_NO-SILK  [SMT-JUMPER_2_NC_PASTE_NO-SILK]  14.48,210.06 90 top
JP14  JUMPER-SMT_2_NC_PASTE_NO-SILK  [SMT-JUMPER_2_NC_PASTE_NO-SILK]  81.28,210.06 90 top
LOGO1  SFE_LOGO_NAME_FLAME.1_INCH  [SFE_LOGO_NAME_FLAME_.1]  60.2,25.91 0 top
LOGO2  OSHW-LOGOM  [OSHW-LOGO-M]  56.39,27.18 0 top
LOGO3  SFE_LOGO_NAME_FLAME.1_INCH  [SFE_LOGO_NAME_FLAME_.1]  127,25.91 0 top
LOGO4  OSHW-LOGOM  [OSHW-LOGO-M]  123.19,27.18 0 top
LOGO5  SFE_LOGO_NAME_FLAME.1_INCH  [SFE_LOGO_NAME_FLAME_.1]  60.2,56.39 0 top
LOGO6  OSHW-LOGOM  [OSHW-LOGO-M]  56.39,57.66 0 top
LOGO7  SFE_LOGO_NAME_FLAME.1_INCH  [SFE_LOGO_NAME_FLAME_.1]  127,56.39 0 top
LOGO8  OSHW-LOGOM  [OSHW-LOGO-M]  123.19,57.66 0 top
LOGO9  SFE_LOGO_NAME_FLAME.1_INCH  [SFE_LOGO_NAME_FLAME_.1]  60.2,86.87 0 top
LOGO10  OSHW-LOGOM  [OSHW-LOGO-M]  56.39,88.14 0 top
LOGO11  SFE_LOGO_NAME_FLAME.1_INCH  [SFE_LOGO_NAME_FLAME_.1]  127,86.87 0 top
LOGO12  OSHW-LOGOM  [OSHW-LOGO-M]  123.19,88.14 0 top
LOGO13  SFE_LOGO_NAME_FLAME.1_INCH  [SFE_LOGO_NAME_FLAME_.1]  60.2,117.35 0 top
LOGO14  OSHW-LOGOM  [OSHW-LOGO-M]  56.39,118.62 0 top
LOGO15  SFE_LOGO_NAME_FLAME.1_INCH  [SFE_LOGO_NAME_FLAME_.1]  127,117.35 0 top
LOGO16  OSHW-LOGOM  [OSHW-LOGO-M]  123.19,118.62 0 top
LOGO17  SFE_LOGO_NAME_FLAME.1_INCH  [SFE_LOGO_NAME_FLAME_.1]  60.2,147.83 0 top
LOGO18  OSHW-LOGOM  [OSHW-LOGO-M]  56.39,149.1 0 top
LOGO19  SFE_LOGO_NAME_FLAME.1_INCH  [SFE_LOGO_NAME_FLAME_.1]  127,147.83 0 top
LOGO20  OSHW-LOGOM  [OSHW-LOGO-M]  123.19,149.1 0 top
LOGO21  SFE_LOGO_NAME_FLAME.1_INCH  [SFE_LOGO_NAME_FLAME_.1]  60.2,178.31 0 top
LOGO22  OSHW-LOGOM  [OSHW-LOGO-M]  56.39,179.58 0 top
LOGO23  SFE_LOGO_NAME_FLAME.1_INCH  [SFE_LOGO_NAME_FLAME_.1]  127,178.31 0 top
LOGO24  OSHW-LOGOM  [OSHW-LOGO-M]  123.19,179.58 0 top
LOGO25  SFE_LOGO_NAME_FLAME.1_INCH  [SFE_LOGO_NAME_FLAME_.1]  60.2,208.79 0 top
LOGO26  OSHW-LOGOM  [OSHW-LOGO-M]  56.39,210.06 0 top
LOGO27  SFE_LOGO_NAME_FLAME.1_INCH  [SFE_LOGO_NAME_FLAME_.1]  127,208.79 0 top
LOGO28  OSHW-LOGOM  [OSHW-LOGO-M]  123.19,210.06 0 top
R1  10k  [0603]  53.21,23.62 270 top
R2  10k  [0603]  51.69,23.62 270 top
R3  200k  [0603]  55.75,22.61 180 top
R4  10k  [0603]  64.14,23.37 270 top
R5  10k  [0603]  62.61,23.37 270 top
R6  1k  [0603]  20.83,19.3 180 top
R7  1k  [0603]  20.83,20.83 180 top
R8  27  [0603]  22.1,24.38 0 top
R9  27  [0603]  22.1,25.91 0 top
R10  10k  [0603]  120.02,23.62 270 top
R11  10k  [0603]  118.49,23.62 270 top
R12  200k  [0603]  122.56,22.61 180 top
R13  10k  [0603]  130.94,23.37 270 top
R14  10k  [0603]  129.41,23.37 270 top
R15  1k  [0603]  87.63,19.3 180 top
R16  1k  [0603]  87.63,20.83 180 top
R17  27  [0603]  88.9,24.38 0 top
R18  27  [0603]  88.9,25.91 0 top
R19  10k  [0603]  53.21,54.1 270 top
R20  10k  [0603]  51.69,54.1 270 top
R21  200k  [0603]  55.75,53.09 180 top
R22  10k  [0603]  64.14,53.85 270 top
R23  10k  [0603]  62.61,53.85 270 top
R24  1k  [0603]  20.83,49.78 180 top
R25  1k  [0603]  20.83,51.31 180 top
R26  27  [0603]  22.1,54.86 0 top
R27  27  [0603]  22.1,56.39 0 top
R28  10k  [0603]  120.02,54.1 270 top
R29  10k  [0603]  118.49,54.1 270 top
R30  200k  [0603]  122.56,53.09 180 top
R31  10k  [0603]  130.94,53.85 270 top
R32  10k  [0603]  129.41,53.85 270 top
R33  1k  [0603]  87.63,49.78 180 top
R34  1k  [0603]  87.63,51.31 180 top
R35  27  [0603]  88.9,54.86 0 top
R36  27  [0603]  88.9,56.39 0 top
R37  10k  [0603]  53.21,84.58 270 top
R38  10k  [0603]  51.69,84.58 270 top
R39  200k  [0603]  55.75,83.57 180 top
R40  10k  [0603]  64.14,84.33 270 top
R41  10k  [0603]  62.61,84.33 270 top
R42  1k  [0603]  20.83,80.26 180 top
R43  1k  [0603]  20.83,81.79 180 top
R44  27  [0603]  22.1,85.34 0 top
R45  27  [0603]  22.1,86.87 0 top
R46  10k  [0603]  120.02,84.58 270 top
R47  10k  [0603]  118.49,84.58 270 top
R48  200k  [0603]  122.56,83.57 180 top
R49  10k  [0603]  130.94,84.33 270 top
R50  10k  [0603]  129.41,84.33 270 top
R51  1k  [0603]  87.63,80.26 180 top
R52  1k  [0603]  87.63,81.79 180 top
R53  27  [0603]  88.9,85.34 0 top
R54  27  [0603]  88.9,86.87 0 top
R55  10k  [0603]  53.21,115.06 270 top
R56  10k  [0603]  51.69,115.06 270 top
R57  200k  [0603]  55.75,114.05 180 top
R58  10k  [0603]  64.14,114.81 270 top
R59  10k  [0603]  62.61,114.81 270 top
R60  1k  [0603]  20.83,110.74 180 top
R61  1k  [0603]  20.83,112.27 180 top
R62  27  [0603]  22.1,115.82 0 top
R63  27  [0603]  22.1,117.35 0 top
R64  10k  [0603]  120.02,115.06 270 top
R65  10k  [0603]  118.49,115.06 270 top
R66  200k  [0603]  122.56,114.05 180 top
R67  10k  [0603]  130.94,114.81 270 top
R68  10k  [0603]  129.41,114.81 270 top
R69  1k  [0603]  87.63,110.74 180 top
R70  1k  [0603]  87.63,112.27 180 top
R71  27  [0603]  88.9,115.82 0 top
R72  27  [0603]  88.9,117.35 0 top
R73  10k  [0603]  53.21,145.54 270 top
R74  10k  [0603]  51.69,145.54 270 top
R75  200k  [0603]  55.75,144.53 180 top
R76  10k  [0603]  64.14,145.29 270 top
R77  10k  [0603]  62.61,145.29 270 top
R78  1k  [0603]  20.83,141.22 180 top
R79  1k  [0603]  20.83,142.75 180 top
R80  27  [0603]  22.1,146.3 0 top
R81  27  [0603]  22.1,147.83 0 top
R82  10k  [0603]  120.02,145.54 270 top
R83  10k  [0603]  118.49,145.54 270 top
R84  200k  [0603]  122.56,144.53 180 top
R85  10k  [0603]  130.94,145.29 270 top
R86  10k  [0603]  129.41,145.29 270 top
R87  1k  [0603]  87.63,141.22 180 top
R88  1k  [0603]  87.63,142.75 180 top
R89  27  [0603]  88.9,146.3 0 top
R90  27  [0603]  88.9,147.83 0 top
R91  10k  [0603]  53.21,176.02 270 top
R92  10k  [0603]  51.69,176.02 270 top
R93  200k  [0603]  55.75,175.01 180 top
R94  10k  [0603]  64.14,175.77 270 top
R95  10k  [0603]  62.61,175.77 270 top
R96  1k  [0603]  20.83,171.7 180 top
R97  1k  [0603]  20.83,173.23 180 top
R98  27  [0603]  22.1,176.78 0 top
R99  27  [0603]  22.1,178.31 0 top
R100  10k  [0603]  120.02,176.02 270 top
R101  10k  [0603]  118.49,176.02 270 top
R102  200k  [0603]  122.56,175.01 180 top
R103  10k  [0603]  130.94,175.77 270 top
R104  10k  [0603]  129.41,175.77 270 top
R105  1k  [0603]  87.63,171.7 180 top
R106  1k  [0603]  87.63,173.23 180 top
R107  27  [0603]  88.9,176.78 0 top
R108  27  [0603]  88.9,178.31 0 top
R109  10k  [0603]  53.21,206.5 270 top
R110  10k  [0603]  51.69,206.5 270 top
R111  200k  [0603]  55.75,205.49 180 top
R112  10k  [0603]  64.14,206.25 270 top
R113  10k  [0603]  62.61,206.25 270 top
R114  1k  [0603]  20.83,202.18 180 top
R115  1k  [0603]  20.83,203.71 180 top
R116  27  [0603]  22.1,207.26 0 top
R117  27  [0603]  22.1,208.79 0 top
R118  10k  [0603]  120.02,206.5 270 top
R119  10k  [0603]  118.49,206.5 270 top
R120  200k  [0603]  122.56,205.49 180 top
R121  10k  [0603]  130.94,206.25 270 top
R122  10k  [0603]  129.41,206.25 270 top
R123  1k  [0603]  87.63,202.18 180 top
R124  1k  [0603]  87.63,203.71 180 top
R125  27  [0603]  88.9,207.26 0 top
R126  27  [0603]  88.9,208.79 0 top
U1  FT231XS  [SSOP20_L]  28.45,22.1 90 top
U2  PCA9306  [PSOP-8]  59.56,23.37 90 top
U3  PCA9685  [TSSOP-28_4MM]  43.17,21.9 0 top
U4  FT231XS  [SSOP20_L]  95.25,22.1 90 top
U5  PCA9306  [PSOP-8]  126.36,23.37 90 top
U6  PCA9685  [TSSOP-28_4MM]  109.97,21.9 0 top
U7  FT231XS  [SSOP20_L]  28.45,52.58 90 top
U8  PCA9306  [PSOP-8]  59.56,53.85 90 top
U9  PCA9685  [TSSOP-28_4MM]  43.17,52.38 0 top
U10  FT231XS  [SSOP20_L]  95.25,52.58 90 top
U11  PCA9306  [PSOP-8]  126.36,53.85 90 top
U12  PCA9685  [TSSOP-28_4MM]  109.97,52.38 0 top
U13  FT231XS  [SSOP20_L]  28.45,83.06 90 top
U14  PCA9306  [PSOP-8]  59.56,84.33 90 top
U15  PCA9685  [TSSOP-28_4MM]  43.17,82.86 0 top
U16  FT231XS  [SSOP20_L]  95.25,83.06 90 top
U17  PCA9306  [PSOP-8]  126.36,84.33 90 top
U18  PCA9685  [TSSOP-28_4MM]  109.97,82.86 0 top
U19  FT231XS  [SSOP20_L]  28.45,113.54 90 top
U20  PCA9306  [PSOP-8]  59.56,114.81 90 top
U21  PCA9685  [TSSOP-28_4MM]  43.17,113.34 0 top
U22  FT231XS  [SSOP20_L]  95.25,113.54 90 top
U23  PCA9306  [PSOP-8]  126.36,114.81 90 top
U24  PCA9685  [TSSOP-28_4MM]  109.97,113.34 0 top
U25  FT231XS  [SSOP20_L]  28.45,144.02 90 top
U26  PCA9306  [PSOP-8]  59.56,145.29 90 top
U27  PCA9685  [TSSOP-28_4MM]  43.17,143.82 0 top
U28  FT231XS  [SSOP20_L]  95.25,144.02 90 top
U29  PCA9306  [PSOP-8]  126.36,145.29 90 top
U30  PCA9685  [TSSOP-28_4MM]  109.97,143.82 0 top
U31  FT231XS  [SSOP20_L]  28.45,174.5 90 top
U32  PCA9306  [PSOP-8]  59.56,175.77 90 top
U33  PCA9685  [TSSOP-28_4MM]  43.17,174.3 0 top
U34  FT231XS  [SSOP20_L]  95.25,174.5 90 top
U35  PCA9306  [PSOP-8]  126.36,175.77 90 top
U36  PCA9685  [TSSOP-28_4MM]  109.97,174.3 0 top
U37  FT231XS  [SSOP20_L]  28.45,204.98 90 top
U38  PCA9306  [PSOP-8]  59.56,206.25 90 top
U39  PCA9685  [TSSOP-28_4MM]  43.17,204.78 0 top
U40  FT231XS  [SSOP20_L]  95.25,204.98 90 top
U41  PCA9306  [PSOP-8]  126.36,206.25 90 top
U42  PCA9685  [TSSOP-28_4MM]  109.97,204.78 0 top

## Library data of the parts
C1 C2 C9 C10 C17 C18 C25 C26 C33 C34 C41 C42 C49 C50 C57 C58 C65 C66 C73 C74 C81 C82 C89 C90 C97 C98 C105 C106 = SparkFun-Capacitors; PROD_ID: CAP-08913
C3 C4 C6-C8 C11 C12 C14-C16 C19 C20 C22-C24 C27 C28 C30-C32 C35 C36 C38-C40 C43 C44 C46-C48 C51 C52 C54-C56 C59 C60 C62-C64 C67 C68 C70-C72 C75 C76 C78-C80 C83 C84 C86-C88 C91 C92 C94-C96 C99 C100 C102-C104 C107 C108 C110-C112 = SparkFun-Capacitors; PROD_ID: CAP-08604
C5 C13 C21 C29 C37 C45 C53 C61 C69 C77 C85 C93 C101 C109 = SparkFun-Capacitors; PROD_ID: CAP-12547
D1 D3 D5 D7 D9 D11 D13 D15 D17 D19 D21 D23 D25 D27 = SparkFun-LED; PROD_ID: DIO-00821
D2 D4 D6 D8 D10 D12 D14 D16 D18 D20 D22 D24 D26 D28 = SparkFun-LED; PROD_ID: DIO-11230
E$1 = SparkFun-Retired
E$7 E$8 FD1-FD56 LOGO1-LOGO28 = SparkFun-Aesthetics
H1-H56 = SparkFun-Hardware
J1 J3-J28 J30-J46 J48-J64 J66-J82 J84-J100 J102-J118 J120-J136 J138-J154 J156-J172 J174-J190 J192-J208 J210-J226 J228-J244 J246-J252 = SparkFun-Connectors
J2 J29 J47 J65 J83 J101 J119 J137 J155 J173 J191 J209 J227 J245 = SparkFun-Connectors; PROD_ID: CONN-11752
JP1-JP14 = SparkFun-Jumpers
R1 R2 R4 R5 R10 R11 R13 R14 R19 R20 R22 R23 R28 R29 R31 R32 R37 R38 R40 R41 R46 R47 R49 R50 R55 R56 R58 R59 R64 R65 R67 R68 R73 R74 R76 R77 R82 R83 R85 R86 R91 R92 R94 R95 R100 R101 R103 R104 R109 R110 R112 R113 R118 R119 R121 R122 = SparkFun-Resistors; PROD_ID: RES-00824
R3 R12 R21 R30 R39 R48 R57 R66 R75 R84 R93 R102 R111 R120 = SparkFun-Resistors; PROD_ID: RES-09385
R6 R7 R15 R16 R24 R25 R33 R34 R42 R43 R51 R52 R60 R61 R69 R70 R78 R79 R87 R88 R96 R97 R105 R106 R114 R115 R123 R124 = SparkFun-Resistors; PROD_ID: RES-07856
R8 R9 R17 R18 R26 R27 R35 R36 R44 R45 R53 R54 R62 R63 R71 R72 R80 R81 R89 R90 R98 R99 R107 R108 R116 R117 R125 R126 = SparkFun-Resistors; PROD_ID: RES-09334
U1 U4 U7 U10 U13 U16 U19 U22 U25 U28 U31 U34 U37 U40 = SparkFun-IC-Comms; PROD_ID: IC-11524
U2 U5 U8 U11 U14 U17 U20 U23 U26 U29 U32 U35 U38 U41 = SparkFun-IC-Comms; PROD_ID: IC-10023
U3 U6 U9 U12 U15 U18 U21 U24 U27 U30 U33 U36 U39 U42 = SparkFun-IC-Special-Function; PROD_ID: IC-12271